# Altium PCB photodiode_pcb.PcbDoc
Units mm, origin at the board's own origin, x right, y up, seen from the top; angles counter-clockwise.
Board outline 16.51 x 5.08 mm, 2 copper layers (F.Cu, B.Cu); 5 components, 2 nets, 4 pads, 0 vias.
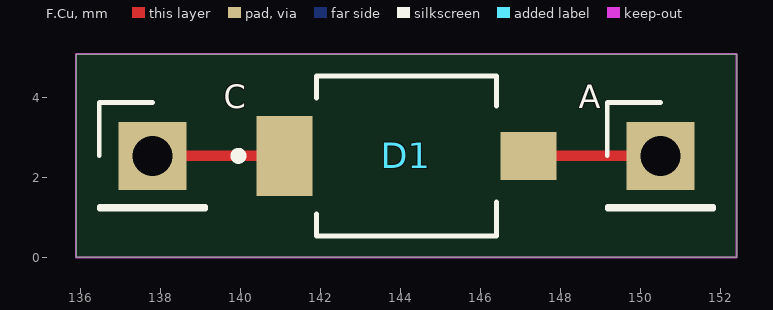
[diagram p0: F.Cu view]
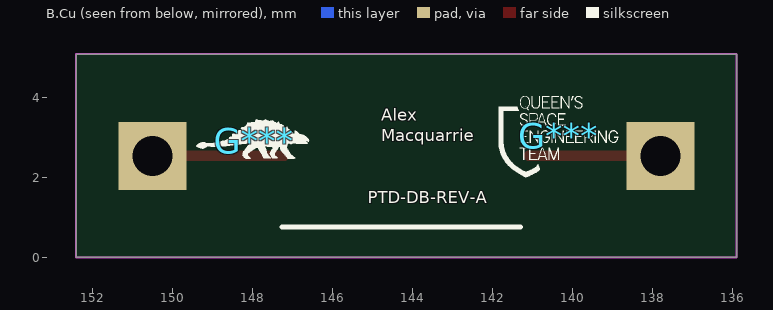
[diagram p1: B.Cu view, seen from below]

## Layer stack, top to bottom
F.Mask: solder mask 0.0102, Solder Resist, Dk 3.5
F.Cu: signal copper 0.0356
Dielectric 1: dielectric 0.32, FR-4, Dk 4.8
B.Cu: signal copper 0.0356
B.Mask: solder mask 0.0102, Solder Resist, Dk 3.5

## Board outline
135.89,5.08 135.89,0 152.4,0 152.4,5.08 135.89,5.08

## Design rules (kind name [scope] priority, off if disabled: settings)
Clearance [All] p1: gap=0.254 ignorepadtopadclearanceinfootprint=FALSE except(0: Arc-Hole Track-Hole SMDPad-Hole THPad-Hole Via-Hole Fill-Hole Poly-Hole Region-Hole Text-Hole)
MinimumSolderMaskSliver [All] p1: minsoldermaskwidth=0
PolygonConnect [All] p1: connectstyle=Direct reliefconductorwidth=0.254 reliefentries=4 polygonreliefangle="90 Angle" airgapwidth=0.254
RoutingVias [All] p1: holewidth=0.711 width=1.27 viastyle="Through Hole" minholewidth=0.711 minwidth=1.27 maxholewidth=0.711 maxwidth=1.27
SilkToSilkClearance [All] p1: silktosilkclearance=0
SilkToSolderMaskClearance [IsPad] p1: minsilkscreentomaskgap=0 clearancetoexposedcopper=TRUE
SolderMaskExpansion [All] p1: expansion=0.102 istentingtop=FALSE
Width [All] p1: maxlimit=10 minlimit=0.254 preferedwidth=0.254 bottomlayer_maxwidth=0.254 minimp=50.000000 maximp=50.000000 favimp=50.000000
27 further rules are at their usual default settings.

## Components (designator, comment, footprint, x,y, rotation, side; value= is the part's Value field where it differs from the comment)
A "Conn_01x01" PinHeader_1x01_P2.54mm_Vertical 150.495,2.54 r0 top
C "Conn_01x01" PinHeader_1x01_P2.54mm_Vertical 137.795,2.54 r0 top
D1 "SFH_2430-Z" DIO_SFH_2430-Z 144.145,2.54 r0 top
G*** "LOGO" LOGO 140.335,3.048 r0 bottom
G*** "LOGO" LOGO 147.955,2.921 r0 bottom

## Footprints (in the part's own frame and the unit in brackets; to place one, negate y for a bottom-side part, rotate by r counter-clockwise, add the part's x,y. Pads: shape width x height; smd on the part's side, far side on the other; paste and mask are expansions set on the pad)
DIO_SFH_2430-Z [mm]
  rect 1.4x1.2 smd paste-1.4 mask-1.4: A(3.05,0)
  rect 1.4x2 smd paste-2 mask-2: C(-3.05,0)
  silkscreen extent -4.3,-2 2.25,2
LOGO [mm]
  silkscreen extent -1.48,-0.99 1.5,1.04
PinHeader_1x01_P2.54mm_Vertical [mm]
  rect 1.7x1.7 hole 1 paste-2539.97 mask+0: 1(0,0)
  silkscreen extent -1.33,-1.33 1.33,1.33

## Part data
A C: library part PinHeader_1x01_P2.54mm_Vertical, "Through hole straight pin header, 1x01, 2.54mm pitch, single row"
D1: library part DIO_SFH_2430-Z

## Nets (pads, with @x,y where several pads share a name; then routed paths per layer and width w, separated by ;. In a path a pad name is that pad's centre, name@x,y a point inside that pad or via, vN(x,y) a via of type N, cw(c..) or ccw(c..) an arc to the next point about the centre after c; other vN are vias at no path point)
Net-(D1-PadA): A.1 D1.A | length 3.3
  F.Cu w0.254: D1.A A.1
Net-(D1-PadC): C.1 D1.C | length 3.3
  F.Cu w0.254: C.1 D1.C

## Keep-outs
Edge.Cuts:
  lines w0.05: 135.89,0 152.4,0 ; 135.89,0 135.89,5.08 ; 135.89,0 152.4,0 ; 135.89,0 135.89,5.08 ; 135.89,5.08 152.4,5.08 ; 135.89,5.08 152.4,5.08 ; 152.4,0 152.4,5.08 ; 152.4,0 152.4,5.08

## Silkscreen, mask and mechanical layers (free items; w line width, h text height)
B.SilkS:
  lines w0.12: 141.287,0.762 147.256,0.762
  text "Alex / Macquarrie" at 144.78,2.81 h0.51
  text "PTD-DB-REV-A" at 145.107,1.253 h0.51